# Altium PCB test_measure.PcbDoc
Units mil, origin at the board's own origin, x right, y up, seen from the top; angles counter-clockwise.
Board outline 1935 x 1585 mil, 2 copper layers (Top Layer, Bottom Layer); 16 components, 21 nets, 30 pads, 0 vias.
Unrouted connection lines stored in the file: 1.
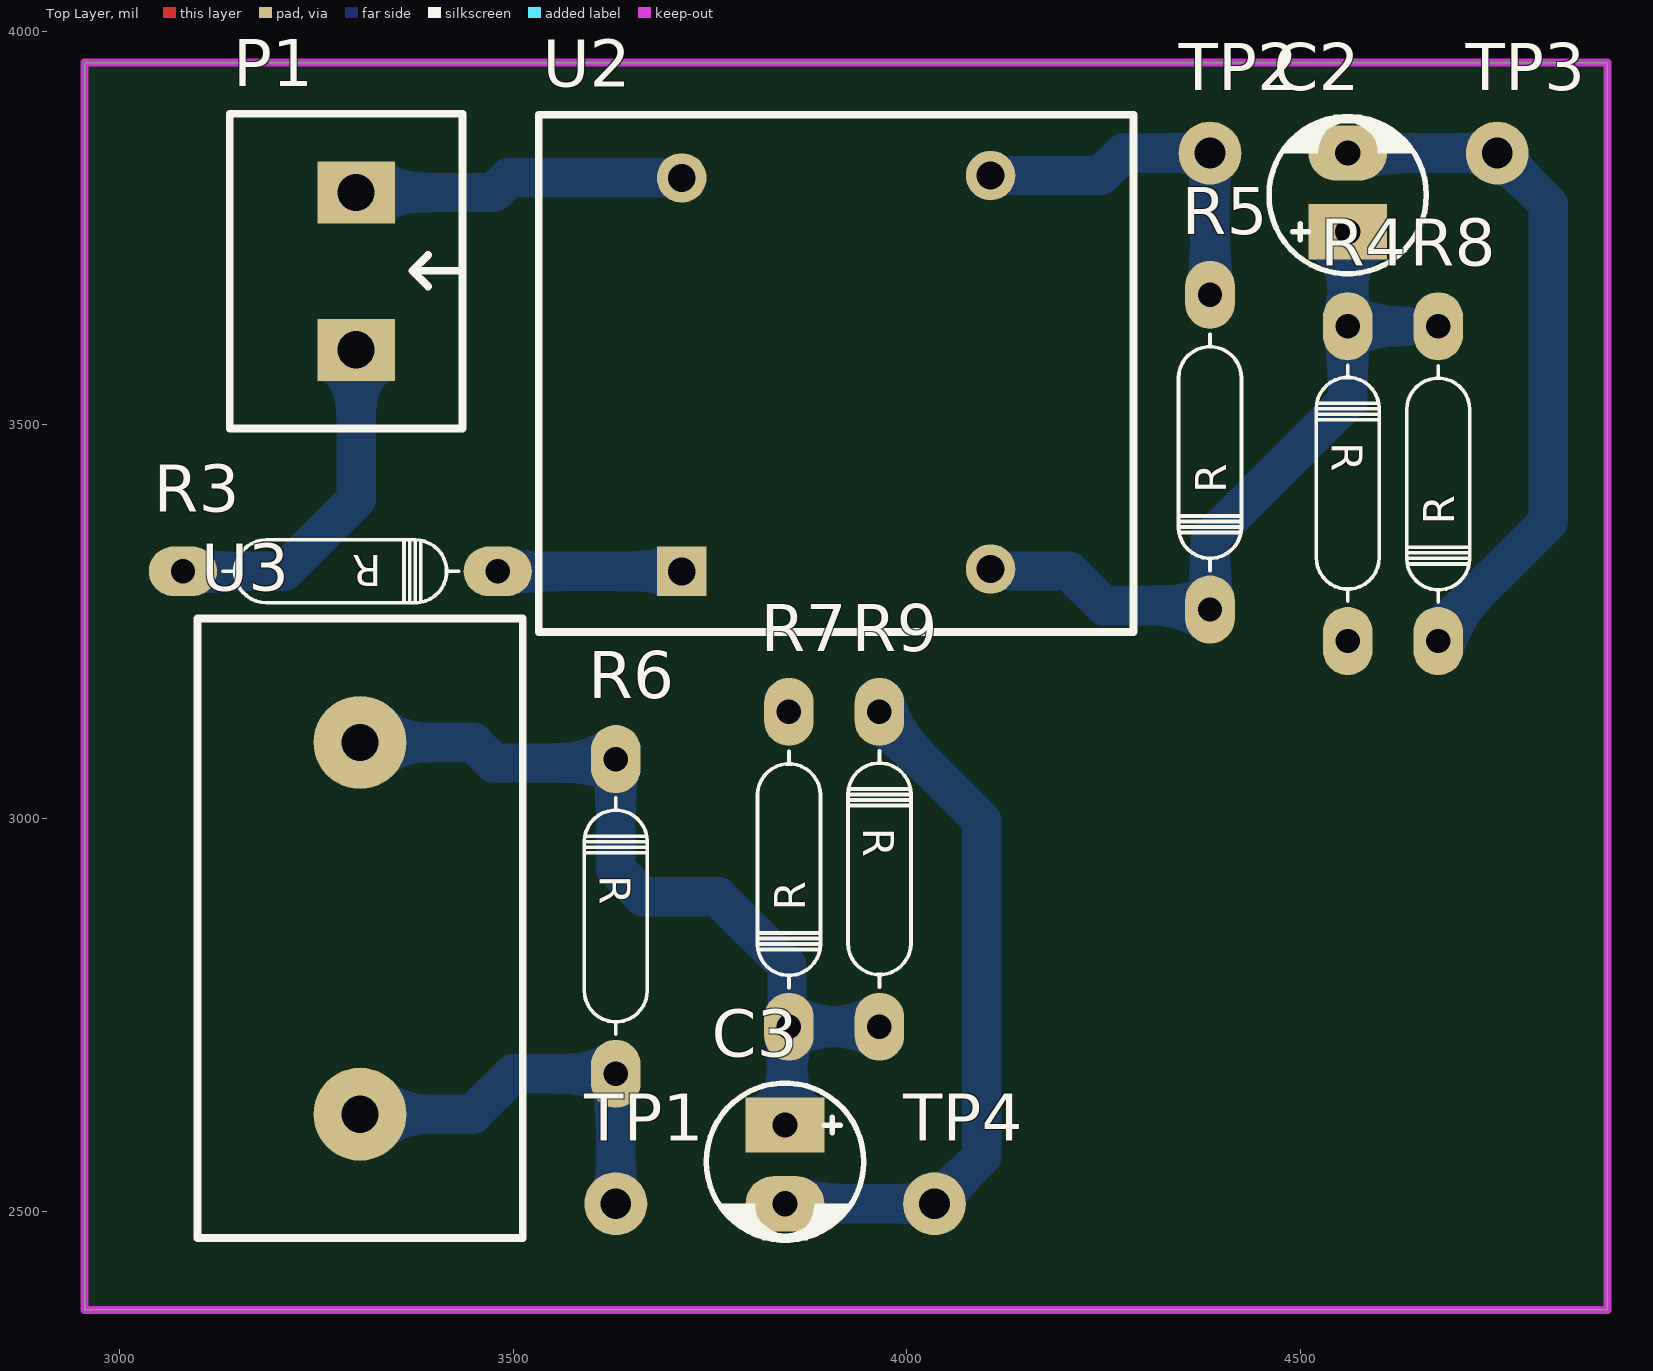
[diagram p0: Top Layer view]
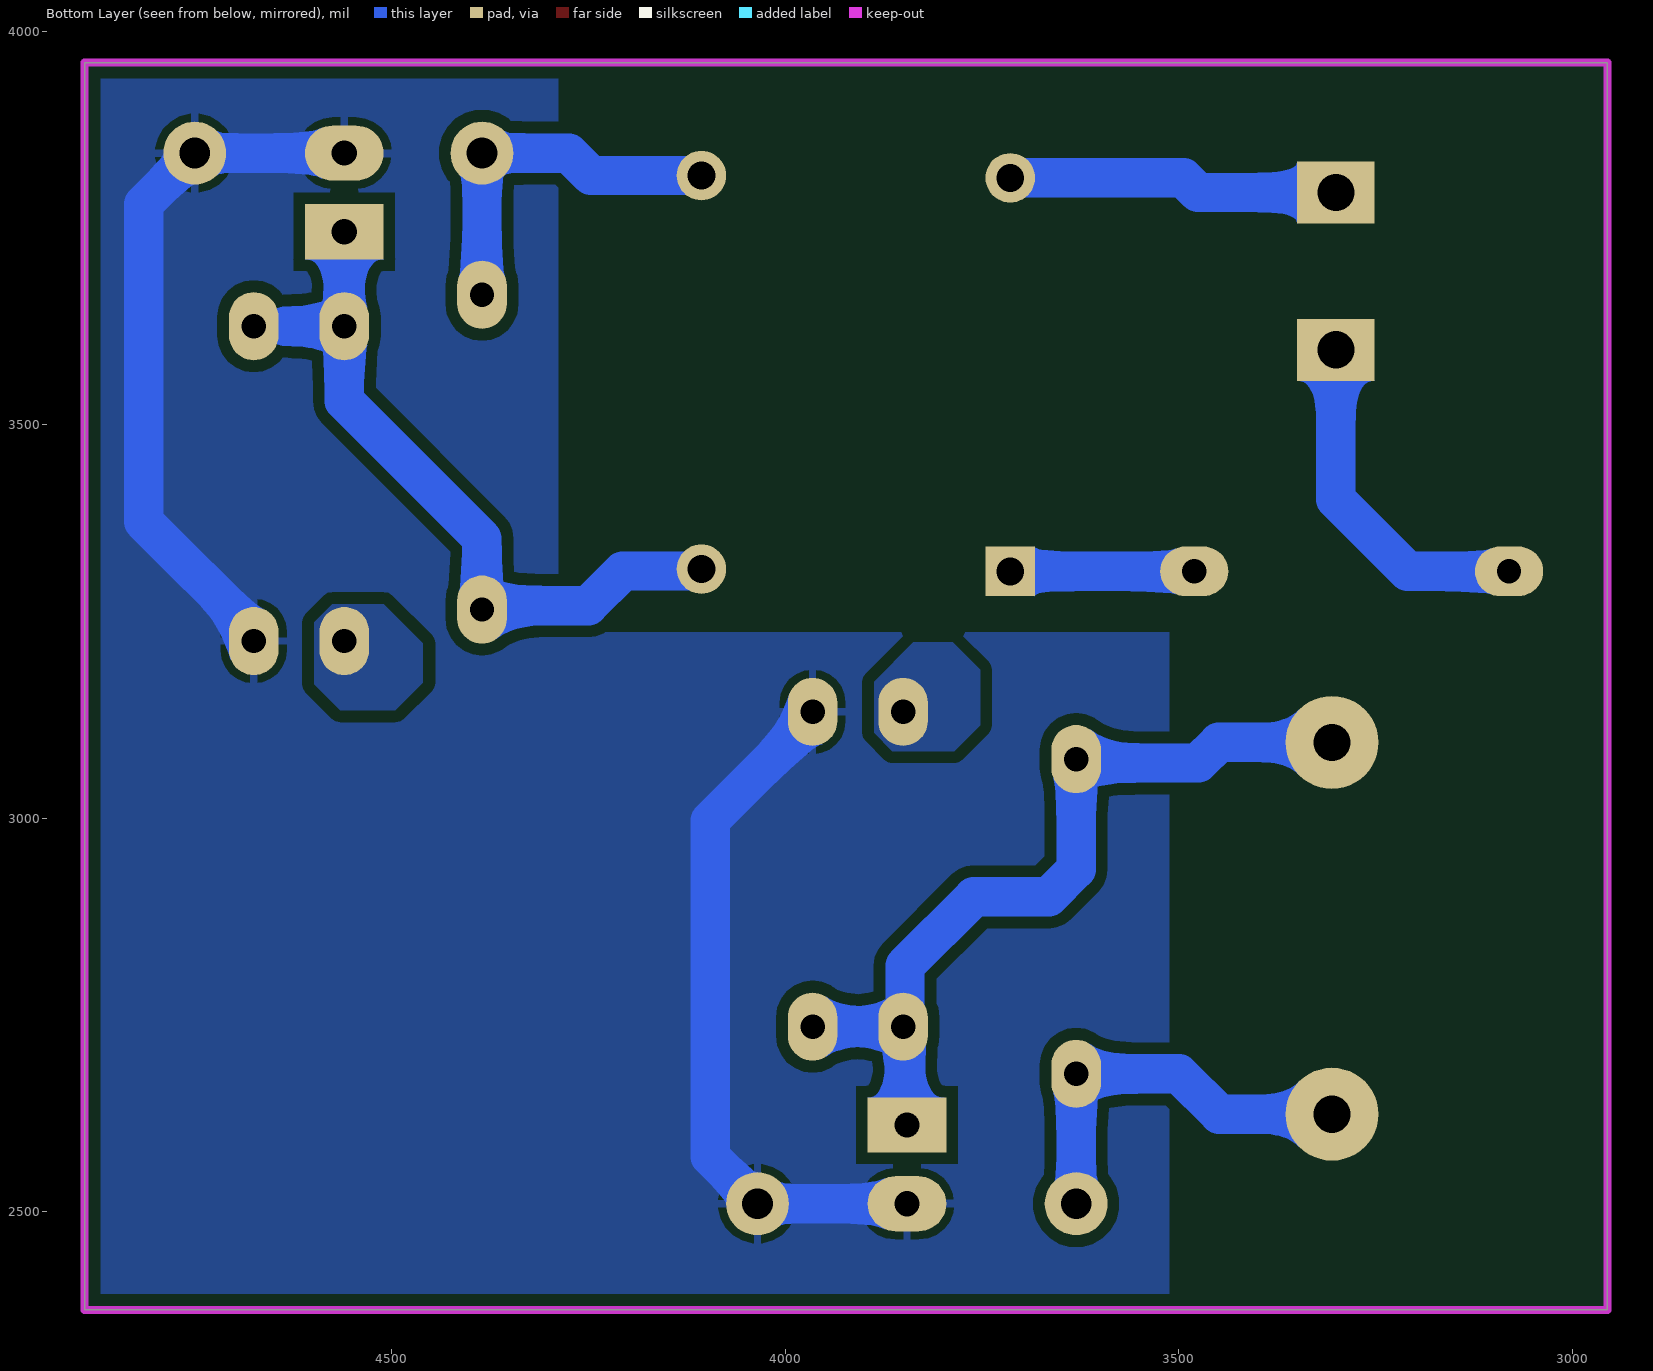
[diagram p1: Bottom Layer view, seen from below]
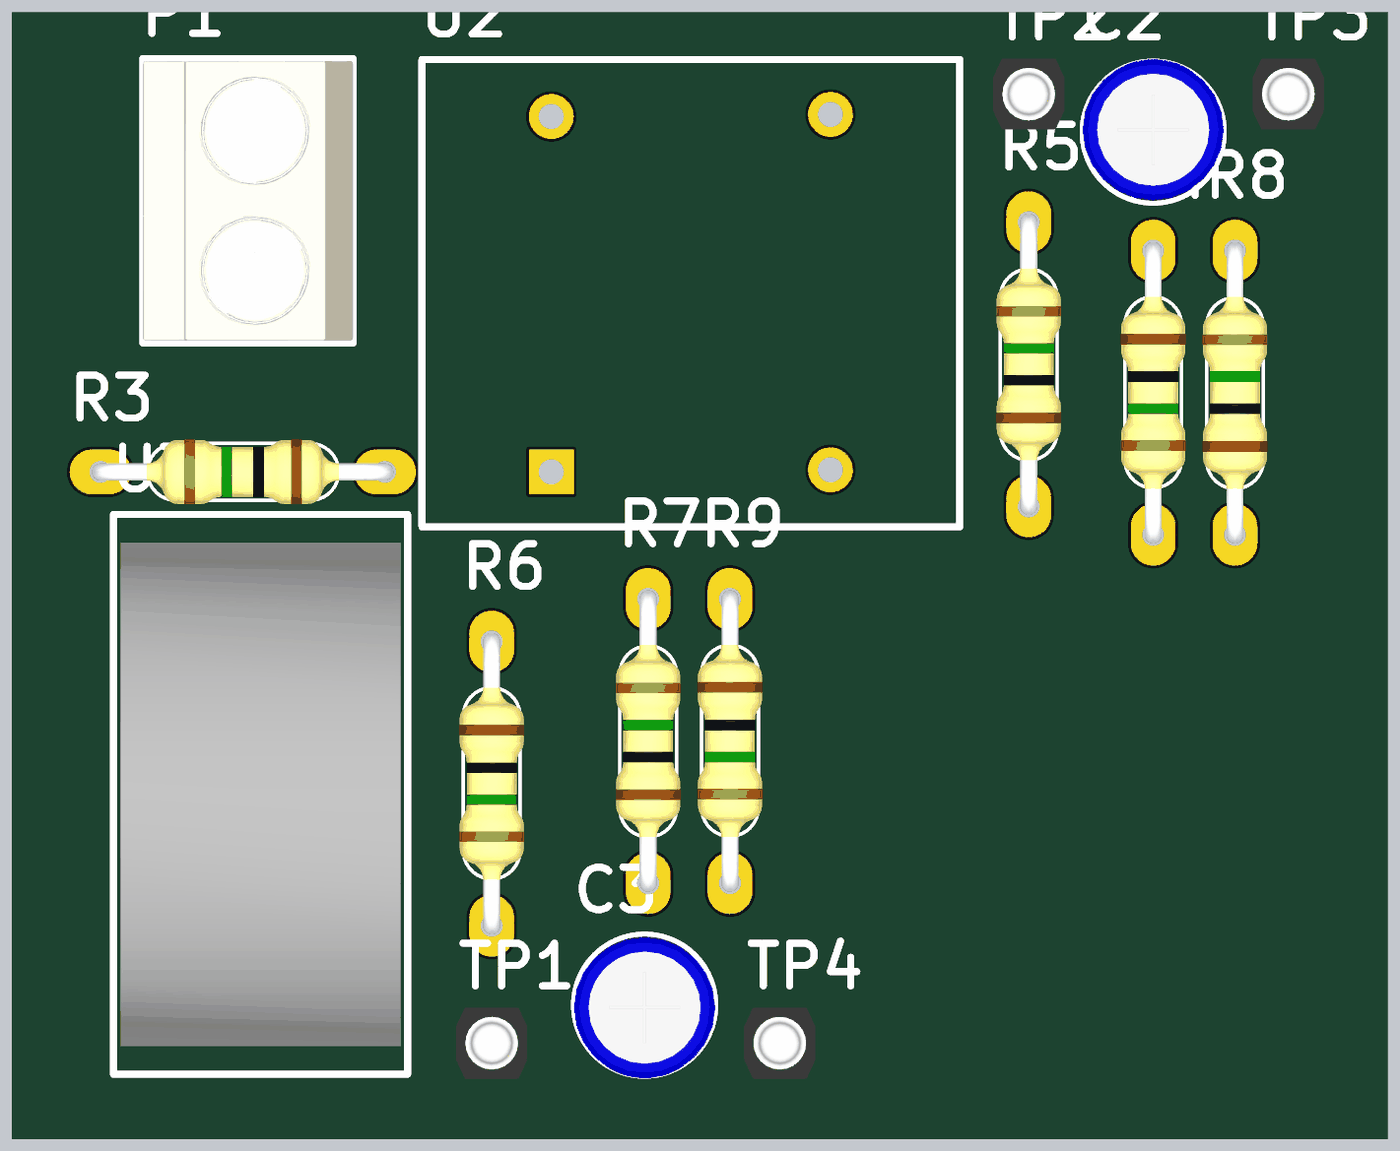
[diagram p2: 3D render of the assembled board from above, using the file's embedded part models]

## Layer stack, top to bottom
Top Solder: solder mask 0.4, Solder Resist, Dk 3.5
Top Layer: signal copper 1.4
Dielectric 1: dielectric 12.6, FR-4, Dk 4.8
Bottom Layer: signal copper 1.4
Bottom Solder: solder mask 0.4, Solder Resist, Dk 3.5

## Board outline
2955,2375 2955,3960 4890,3960 4890,2375

## Design rules (kind name [scope] priority, off if disabled: settings)
Clearance [All] p1: gap=15 ignorepadtopadclearanceinfootprint=FALSE
PolygonConnect PolygonConnect_2 [All vs IsNamedPolygon('+3.3_L02_P001')] p1: thpad.connectstyle=Direct thpad.reliefconductorwidth=10 thpad.reliefentries=4 thpad.polygonreliefangle="90 Angle" thpad.airgapwidth=10 smdpad.connectstyle=Relief smdpad.reliefconductorwidth=10 smdpad.reliefentries=4 smdpad.polygonreliefangle="90 Angle" smdpad.airgapwidth=10 via.connectstyle=Relief via.reliefconductorwidth=10 via.reliefentries=4 via.polygonreliefangle="90 Angle" via.airgapwidth=10
PolygonConnect PolygonConnect_1 [All vs IsNamedPolygon('+3.3_L02_P000')] p2: thpad.connectstyle=Direct thpad.reliefconductorwidth=10 thpad.reliefentries=4 thpad.polygonreliefangle="90 Angle" thpad.airgapwidth=10 smdpad.connectstyle=Relief smdpad.reliefconductorwidth=10 smdpad.reliefentries=4 smdpad.polygonreliefangle="90 Angle" smdpad.airgapwidth=10 via.connectstyle=Relief via.reliefconductorwidth=10 via.reliefentries=4 via.polygonreliefangle="90 Angle" via.airgapwidth=10
PolygonConnect [All] p3: connectstyle=Relief reliefconductorwidth=10 reliefentries=4 polygonreliefangle="90 Angle" airgapwidth=10
RoutingVias [All] p1: holewidth=28 width=50 viastyle="Through Hole" minholewidth=28 minwidth=50 maxholewidth=28 maxwidth=50
SolderMaskExpansion [All] p1: expansion=4 istentingtop=FALSE
Width [All] p1: maxlimit=50 minlimit=20 preferedwidth=20
30 further rules are at their usual default settings.

## Components (designator, comment, footprint, x,y, rotation, side; value= is the part's Value field where it differs from the comment)
C2 "Cap Pol" CP1/2 4560,3745 r90 top value=1uF
C3 "Cap Pol" CP1/2 3845,2610 r270 top value=1uF
P1 "Domino 2" "DOMINO 2- 5mm" 3300,3695 r270 top
R3 "RESISTOR" "RES 1/4 W" 3480,3313.56 r180 top value=47k/5%
R4 "RESISTOR" "RES 1/4 W" 4560,3625 r270 top value=10k/5%
R5 "RESISTOR" "RES 1/4 W" 4385,3265 r90 top value=220/5%
R6 "RESISTOR" "RES 1/4 W" 3630,3075 r270 top value=220/5%
R7 "RESISTOR" "RES 1/4 W" 3850,2735 r90 top value=10k/5%
R8 "RESISTOR" "RES 1/4 W" 4675,3225 r90 top value=10k/5%
R9 "RESISTOR" "RES 1/4 W" 3965,3135 r270 top value=10k/5%
TP1 "Test Point" TP 3630,2510 r0 top
TP2 "Test Point" TP 4385,3845 r180 top
TP3 "Test Point" TP 4750,3845 r180 top
TP4 "Test Point" TP 4035,2510 r0 top
U2 "ZMPT101B" ZMPT101B 3910,3565 r180 top
U3 "ZMCT103C" ZMCT103 3305,2860 r90 top

## Footprints (in the part's own frame and the unit in brackets; to place one, negate y for a bottom-side part, rotate by r counter-clockwise, add the part's x,y. Pads: shape width x height; smd on the part's side, far side on the other; paste and mask are expansions set on the pad)
CP1/2 [mil] "Tu hoa < 22uF/16>50V"
  rect 70x100 hole 32: 1(0,0)
  oval 70x100 hole 32: 2(100,0)
  silkscreen extent -53,-100 146,100, body extent -49,-99 149,99, height 287
"DOMINO 2- 5mm" [mm]
  rect 2x2.5 hole 1.2: 1(-2.54,0) 2(2.54,0)
  silkscreen extent -5.08,-4.08 5.08,3.43, body extent -5,-4.07 5,3.43, height 10
"RES 1/4 W" [mm]
  oval 2.2x1.6 hole 0.787: 1(0,0) 2(10.16,0)
  silkscreen extent 1.26,-1.02 8.88,1.02, body extent -0.3,-1.16 10.46,1.16, height 2.93
TP [mil] "Connect 1"
  round 80 hole 39: TP1(0,0)
  body extent -50,-50 50,50, height 179
ZMCT103 [mm] "Precision Current Sensor"
  round 3 hole 1.2: 1(-6,0) 2(6,0)
  silkscreen extent -10,-5.25 10,5.25, body extent -9,-5 9,5, height 19
ZMPT101B [mm]
  rect 1.6x1.6 hole 0.9: 1(4.985,6.387)
  round 1.6 hole 0.9: 2(4.985,-6.313) 3(-4.985,-6.387) 4(-4.985,6.313)
  silkscreen extent -9.6,-8.35 9.6,8.35

## Part data
C2 C3: "Polarized Capacitor (Radial)"
P1: "Domino, 2-Pin", LatestRevisionDate=17-Jul-2002, LatestRevisionNote="Re-released for DXP Platform.", Publisher="Altium Limited"
R3 R4 R5 R6 R7 R8 R9: "Resistor"
U2: "Minuscule 2mA/2mA Precision Voltage Transformer"
U3: "Precision Current Sensor 5A"

## Nets (pads, with @x,y where several pads share a name; then routed paths per layer and width w, separated by ;. In a path a pad name is that pad's centre, name@x,y a point inside that pad or via, vN(x,y) a via of type N, cw(c..) or ccw(c..) an arc to the next point about the centre after c; other vN are vias at no path point)
+3.3: R4.2 R7.2
+5: 
CONSTRACT: 
CURRENT_ADC: R6.2 TP1.TP1 U3.1 | length 511.2
  Bottom Layer w50: U3.1 3448.1,2623.78 3499.32,2675 R6.2 TP1.TP1
GND: C2.2 C3.2 R8.1 R9.1 TP3.TP1 TP4.TP1 | length 1788.6
  Bottom Layer w50: C3.2 TP4.TP1 4095,2570 4095,2996.7 3965,3126.7 R9.1 ; C2.2 TP3.TP1 4815,3780 4815,3376.81 4675,3236.81 R8.1
LCD_DB4: 
LCD_DB5: 
LCD_DB6: 
LCD_DB7: 
LCD_E: 
LCD_RS: 
LCD_RW: 
NetC2_1: C2.1 R4.1 R5.1 R8.2 U2.4 | length 927.5
  Bottom Layer w50: U2.4 4108.75,3313.95 4206.05,3313.95 4250,3270 4380,3270 R5.1 4385,3355 4560,3530 R4.1 ; C2.1 R4.1 ; 4635,3625 R4.1
NetC3_1: C3.1 R6.1 R7.1 R9.2 U3.2 | length 1066.8
  Bottom Layer w50: U3.2 3448.78,3096.22 3475,3070 3625,3070 R6.1 3630,2935 3665,2900 3759.97,2900 3847.49,2812.49 3847.49,2792.49 ; C3.1 3847.51,2612.51 3847.51,2732.51 R7.1 ; 3847.51,2792.46 3847.51,2737.49 R7.1 ; R9.2 R7.1
NetD2_1: 
NetJDC1_1: 
NetP1_1: P1.1 U2.2 | length 421.4
  Bottom Layer w50: P1.1 3475,3795 3493.56,3813.56 U2.2
NetP1_2: P1.2 R3.2 | length 447.9
  Bottom Layer w50: R3.2 3208.56,3313.56 3300,3405 P1.2
NetR3_1: R3.1 U2.1 | length 233.7
  Bottom Layer w50: R3.1 U2.1
NRST: 
VOLTAGE_ADC: R5.2 TP2.TP1 U2.3 | length 470.6
  Bottom Layer w50: U2.3 4246.44,3816.44 4275,3845 TP2.TP1 R5.2

## Polygon pours and split planes (outlines as drawn)
GND on Bottom Layer "GND_L02_P003" (solid, remove dead copper, pour order 3): 2955,2375 2955,3960 4890,3960 4890,2375
+3.3 on Bottom Layer "+3.3_L02_P001" (solid, pour order 1): 4575,3271.9 4510,3271.9 4460,3221.9 4460,3171.9 4495,3136.9 4565,3136.9 4598.25,3170.15 4598.25,3248.65
+3.3 on Bottom Layer "+3.3_L02_P000" (solid, pour order 0): 3886.9,3108.19 3886.9,3173.19 3836.9,3223.19 3786.9,3223.19 3751.9,3188.19 3751.9,3118.19 3785.15,3084.94 3863.65,3084.94

## Keep-outs
Keep-Out Layer:
  the board outline again, w10

## Other copper
Bottom Layer:
  pour cut-out: 2975,3253.7 3511.69,3253.7 3511.69,2395 2975,2395
  pour cut-out: 2975,3940 4287.95,3940 4287.95,3236.26 2975,3236.26

## Text inside footprints (layer, text, board x,y; h text height)
R3: Top Overlay "R" at 3332.5,3334.06 h39.37 r180
R4: Top Overlay "R" at 4539.5,3477.5 h39.37 r270
R5: Top Overlay "R" at 4405.5,3412.5 h39.37 r90
R6: Top Overlay "R" at 3609.5,2927.5 h39.37 r270
R7: Top Overlay "R" at 3870.5,2882.5 h39.37 r90
R8: Top Overlay "R" at 4695.5,3372.5 h39.37 r90
R9: Top Overlay "R" at 3944.5,2987.5 h39.37 r270